# Altium PCB pcb - 副本.PcbDoc
Units mm, origin at the board's own origin, x right, y up, seen from the top; angles counter-clockwise.
Board outline 80.25 x 40.25 mm, 2 copper layers (Top Layer, Bottom Layer); 55 components, 41 nets, 228 pads, 54 vias.
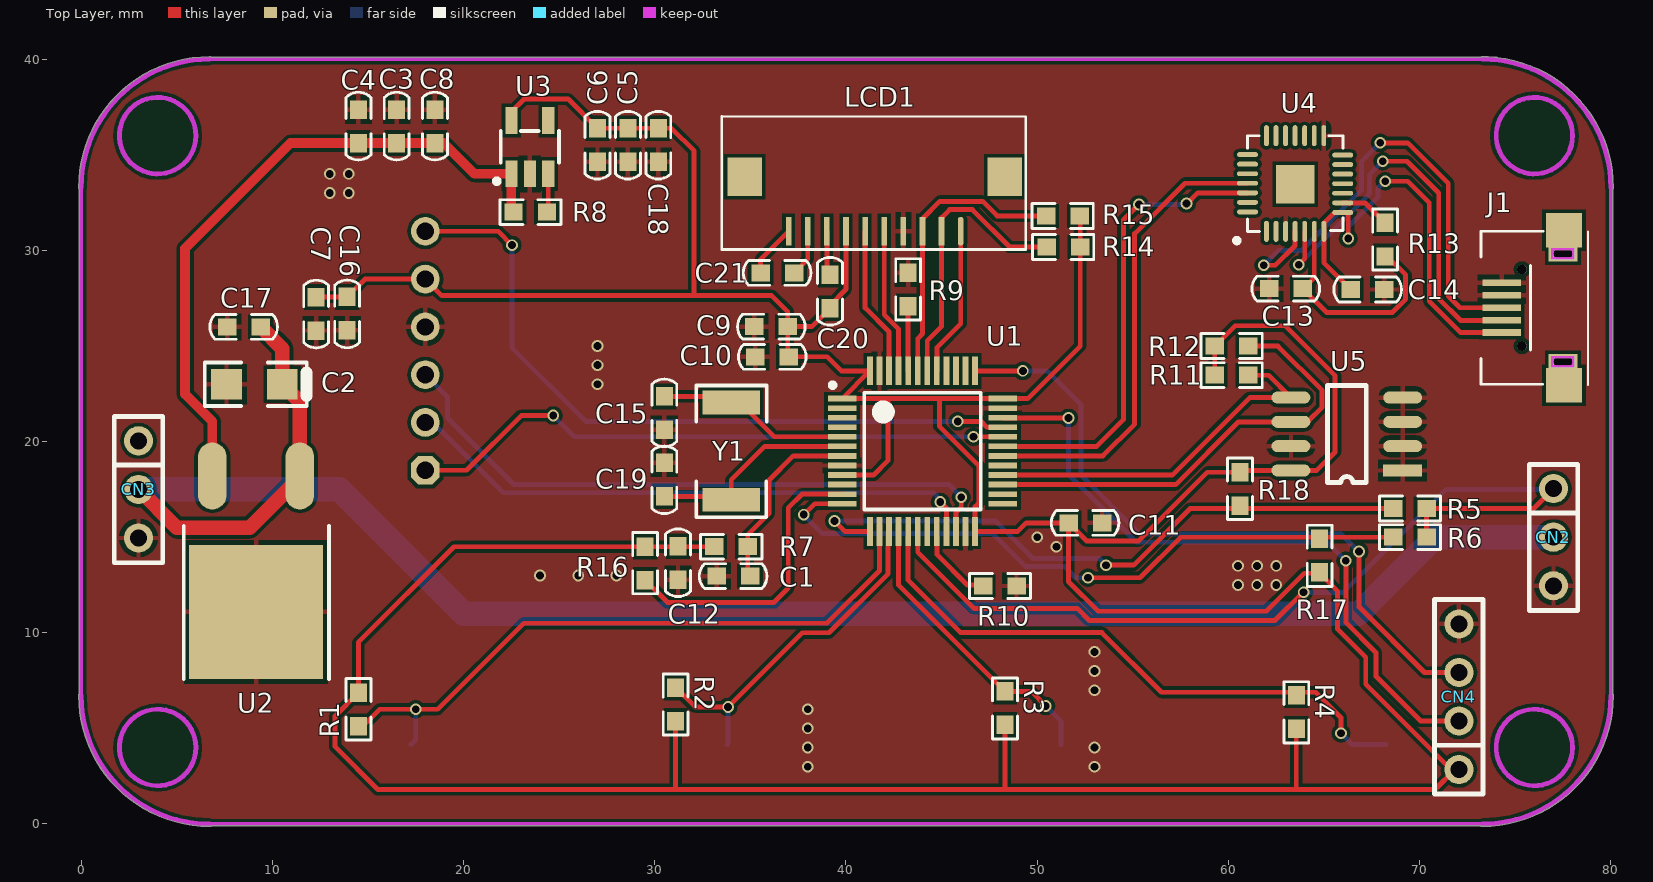
[diagram p0: Top Layer view]
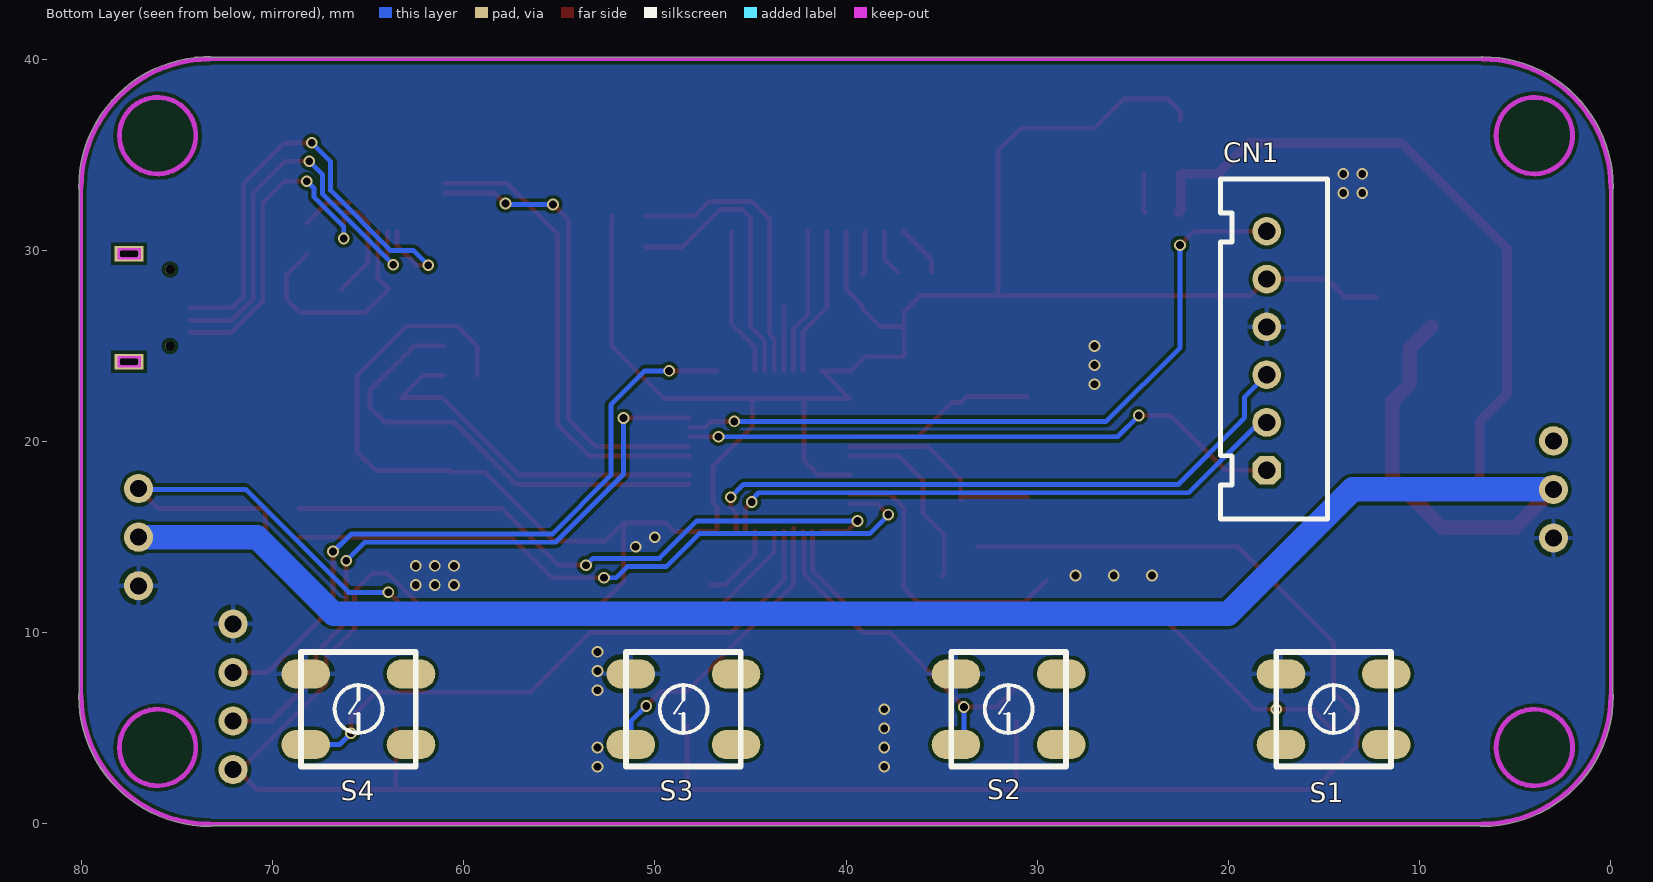
[diagram p1: Bottom Layer view, seen from below]
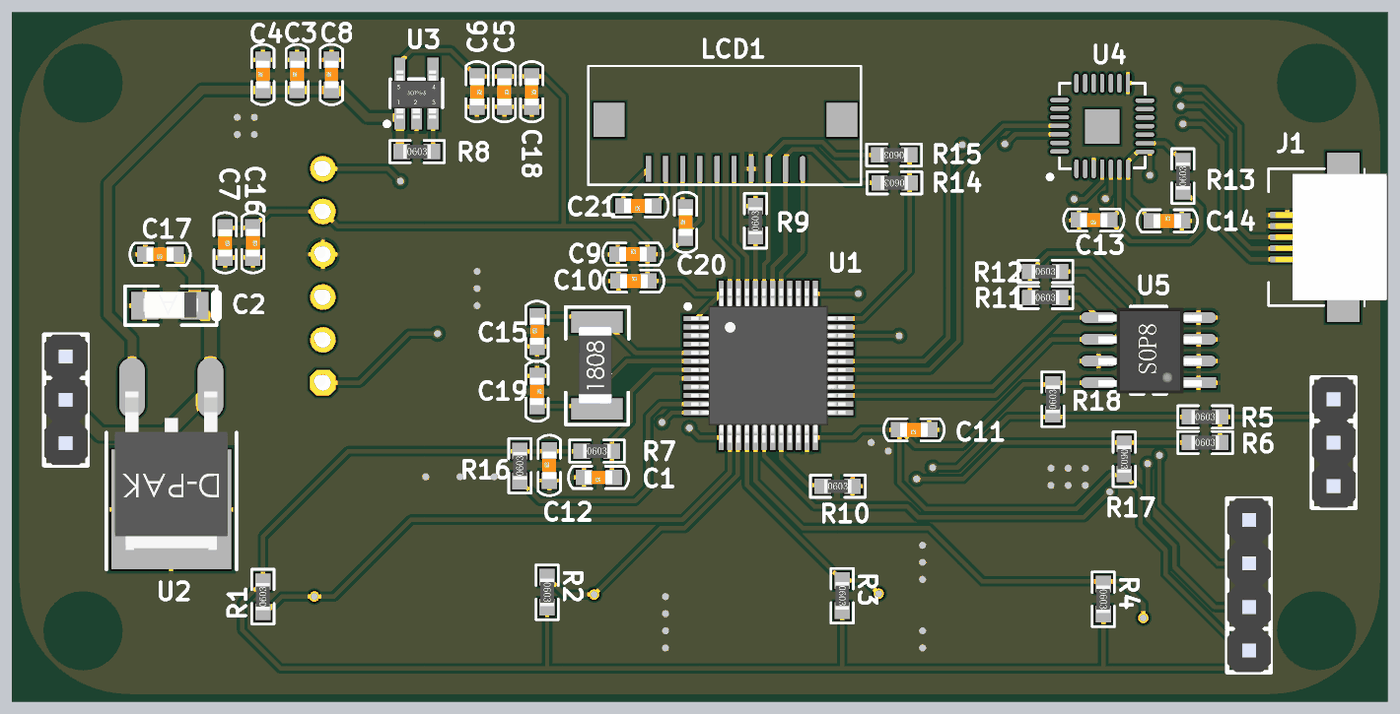
[diagram p2: 3D render of the assembled board from above, using the file's embedded part models]

## Layer stack, top to bottom
Top Solder: solder mask 0.0102, Solder Resist, Dk 3.5
Top Layer: signal copper 0.0356
Dielectric1: dielectric 0.32, FR-4, Dk 4.8
Bottom Layer: signal copper 0.0356
Bottom Solder: solder mask 0.0102, Solder Resist, Dk 3.5

## Board outline
-0.127,6.716 ccw(c6.716,6.716) 6.716,-0.127 ccw(c6.716,0) 6.795,-0.1 73.205,-0.1 ccw(c73.284,0) 73.284,-0.127 ccw(c73.284,6.716) 80.127,6.716 ccw(c80,6.716) 80.1,6.795 80.1,33.205 ccw(c80,33.284) 80.127,33.284 ccw(c73.284,33.284) 74.055,40.084 ccw(c74,40) 74,40.1 73.891,40.1 ccw(c73.284,33.284) 73.284,40.127 ccw(c73.284,40) 73.205,40.1 6.795,40.1 ccw(c6.716,40) 6.716,40.127 ccw(c6.716,33.284) -0.127,33.284 ccw(c0,33.284) -0.1,33.205 -0.1,6.795 ccw(c0,6.716)

## Design rules (kind name [scope] priority, off if disabled: settings)
Clearance [All] p1: gap=0.178
ComponentClearance [All] p1: gap=0 collisioncheckmode=3 verticalgap=0 showdistances=TRUE
PlaneConnect PlaneConnect_3 [InNet('VBAT')] p1: planeconnectstyle=Direct reliefexpansion=0.508 reliefentries=4 reliefconductorwidth=0.254 reliefairgap=0.254
PlaneConnect PlaneConnect_2 [InNet('GND')] p2: planeconnectstyle=Direct reliefexpansion=0.508 reliefentries=4 reliefconductorwidth=0.254 reliefairgap=0.254
PlaneConnect PlaneConnect_1 [InNet('VCC3V3')] p3: planeconnectstyle=Direct reliefexpansion=0.508 reliefentries=4 reliefconductorwidth=0.254 reliefairgap=0.254
PlaneConnect [All] p4: planeconnectstyle=Relief reliefexpansion=0.508 reliefentries=4 reliefconductorwidth=0.254 reliefairgap=0.254
PolygonConnect PolygonConnect_2 [IsVia] p1: connectstyle=Direct reliefconductorwidth=0.254 reliefentries=4 polygonreliefangle="90 Angle" airgapwidth=0.254
PolygonConnect PolygonConnect_1 [All vs InNet('VBAT')] p2: connectstyle=Direct reliefconductorwidth=0.254 reliefentries=4 polygonreliefangle="90 Angle" airgapwidth=0.254
PolygonConnect [All] p3: connectstyle=Relief reliefconductorwidth=0.254 reliefentries=4 polygonreliefangle="90 Angle" airgapwidth=0.254
RoutingVias [All] p1: holewidth=0.711 width=1.27 viastyle="Through Hole" minholewidth=0.406 minwidth=1.27 maxholewidth=0.711 maxwidth=1.27
SilkToSolderMaskClearance SilkscreenOverComponentPads [IsPad] p1: minsilkscreentomaskgap=0.254 clearancetoexposedcopper=TRUE
SolderMaskExpansion [All] p1: expansion=0.102
Width [All] p1: maxlimit=1.27 minlimit=0.254 preferedwidth=0.254
27 further rules are at their usual default settings.

## Components (designator, comment, footprint, x,y, rotation, side; value= is the part's Value field where it differs from the comment)
C1 "0.1uF" CAP-0603 34.097,12.964 r180 top
C2 "10uF" CAP-A 9,23 r180 top
C3 "0.1uF" CAP-0603 16.5,36.5 r90 top
C4 "0.1uF" CAP-0603 14.5,36.5 r90 top
C5 "0.1uF" CAP-0603 28.594,35.5 r270 top
C6 "0.1uF" CAP-0603 27,35.5 r270 top
C7 "0.33uF" CAP-0603 8.5,26 r180 top
C8 "0.1uF" CAP-0603 18.5,36.5 r90 top
C9 "0.1uF" CAP-0603 36.093,26.01 r0 top
C10 "0.1uF" CAP-0603 36.144,24.435 r0 top
C11 "0.1uF" CAP-0603 52.502,15.748 r180 top
C12 "0.1uF" CAP-0603 31.217,13.665 r90 top
C13 "0.1uF" CAP-0603 63,28 r180 top
C14 "0.1uF" CAP-0603 67.284,27.953 r0 top
C15 "22P" CAP-0603 30.5,21.5 r90 top
C16 "0.1uF" CAP-0603 13.912,26.678 r270 top
C17 "0.1uF" CAP-0603 12.294,26.67 r270 top
C18 "0.1uF" CAP-0603 30.187,35.5 r270 top
C19 "22P" CAP-0603 30.5,18 r270 top
C20 "0.1uF" CAP-0603 39.167,27.864 r90 top
C21 "1uF" CAP-0603 36.398,28.829 r180 top
CN1 "CN-6" CN-6 18,18.5 r90 bottom locked
CN2 "CN-3" IDC-3×1 77,15 r90 top
CN3 "CN-3" IDC-3×1 3,17.5 r90 top
CN4 "CN-4" IDC-4×1 72.053,2.845 r270 top
J1 "USB-micro" USB-MICRO 77,27 r90 top
LCD1 "LCD1602_I2C" LCD-IIC 41.5,36 r180 top
R1 "10K" RES-0603 14.5,6 r90 top
R2 "10K" RES-0603 31.09,6.248 r270 top
R3 "10K" RES-0603 48.311,6.045 r270 top
R4 "10K" RES-0603 63.551,5.842 r270 top
R5 "120R" RES-0603 69.5,16.5 r0 top
R6 "0R" RES-0603 69.5,15 r0 top
R7 "10K" RES-0603 34,14.5 r0 top
R8 "200K" RES-0603 23.5,32 r0 top
R9 "10K" RES-0603 43.25,27.959 r90 top
R10 "10K" RES-0603 48.057,12.446 r0 top
R11 "10K" RES-0603 60.173,24.994 r0 top
R12 "10K" RES-0603 60.173,23.47 r0 top
R13 "4.7K" RES-0603 68.199,30.569 r90 top
R14 "10K" RES-0603 51.359,30.175 r180 top
R15 "10K" RES-0603 51.333,31.801 r180 top
R16 "2K" RES-0603 29.5,13.644 r90 top
R17 "3K" RES-0603 64.772,14.027 r270 top
R18 "10K" RES-0603 60.607,17.532 r90 top
S1 "KEY" KEY-4X4X1.5 14.5,6 r180 bottom
S2 "KEY" KEY-4X4X1.5 31.5,6 r180 bottom
S3 "KEY" KEY-4X4X1.5 48.5,6 r180 bottom
S4 "KEY" KEY-4X4X1.5 65.5,6 r180 bottom
U1 "STM32F103C" LQFP-48 44,19.5 r0 top locked
U2 "L7805" TO-252 9.152,13.5 r270 top
U3 "spx6205" SOT-23(5) 22.5,34 r0 top
U4 "CP2102" QFN-28 61,36 r0 top
U5 "AT24C128" SOP-8(3.9) 69.113,18.491 r180 top
Y1 "8MHZ" XTAL-2512 34,19.5 r90 top

## Footprints (in the part's own frame and the unit in brackets; to place one, negate y for a bottom-side part, rotate by r counter-clockwise, add the part's x,y. Pads: shape width x height; smd on the part's side, far side on the other; paste and mask are expansions set on the pad)
CAP-0603 [mil]
  rect 38x35 smd: 1(-35,0) 2(34,0)
  silkscreen extent -70,-26 70,26, body extent -31,-16 32,16, height 12
CAP-A [mm]
  rect 1.6x1.6 smd: 1(-1.524,0) 2(1.397,0)
  silkscreen extent -2.79,-1.14 2.54,1.14, body extent -1.73,-0.84 1.47,0.76, height 1.6
CN-6 [mm]
  oct 1.5x1.5 hole 0.9: 1(0,0)
  round 1.5 hole 0.9: 2(2.5,0) 3(5,0) 4(7.5,0) 5(10,0) 6(12.5,0)
  silkscreen extent -2.54,-3.18 15.24,2.41, body extent -2.4,-1.77 15.1,2.03, height 6
IDC-3×1 [mil]
  round 60 hole 35: 1(100,0) 2(0,0) 3(-100,0)
  silkscreen extent -151,-50 150,50, body extent -150,-50 150,50, height 315
IDC-4×1 [mil]
  round 60 hole 35: 1(0,0) 2(-100,0) 3(-200,0) 4(-300,0)
  silkscreen extent -350,-50 50,50, body extent -350,-50 50,50, height 315
KEY-4X4X1.5 [mm]
  oval 2.54x1.524 smd: 1(-2.75,1.85) 2(-2.75,-1.85) 3(2.75,-1.85) 4(2.75,1.85)
  silkscreen extent -3,-3 3,3
LCD-IIC [mm]
  rect 1.8x2 smd: 0(-6.8,2.15) 0(6.8,2.15)
  oval 0.3x1.5 smd: 1(-4.5,5)
  rect 0.3x1.5 smd: 2(-3.5,5) 3(-2.5,5) 4(-1.5,5) 5(-0.5,5) 6(0.5,5) 7(1.5,5) 8(2.5,5) 9(3.5,5) 10(4.5,5)
  silkscreen extent -7.92,-1 8,5.94
LQFP-48 [mm]
  rect 1.5x0.3 smd: 1(-4.2,2.75) 2(-4.2,2.25) 3(-4.2,1.75) 4(-4.2,1.25) 5(-4.2,0.75) 6(-4.2,0.25) 7(-4.2,-0.25) 8(-4.2,-0.75) 9(-4.2,-1.25) 10(-4.2,-1.75) 11(-4.2,-2.25) 12(-4.2,-2.75) 25(4.2,-2.75) 26(4.2,-2.25) 27(4.2,-1.75) 28(4.2,-1.25) 29(4.2,-0.75) 30(4.2,-0.25) 31(4.2,0.25) 32(4.2,0.75) 33(4.2,1.25) 34(4.2,1.75) 35(4.2,2.25) 36(4.2,2.75)
  rect 0.3x1.5 smd: 13(-2.75,-4.2) 14(-2.25,-4.2) 15(-1.75,-4.2) 16(-1.25,-4.2) 17(-0.75,-4.2) 18(-0.25,-4.2) 19(0.25,-4.2) 20(0.75,-4.2) 21(1.25,-4.2) 22(1.75,-4.2) 23(2.25,-4.2) 24(2.75,-4.2) 37(2.75,4.2) 38(2.25,4.2) 39(1.75,4.2) 40(1.25,4.2) 41(0.75,4.2) 42(0.25,4.2) 43(-0.25,4.2) 44(-0.75,4.2) 45(-1.25,4.2) 46(-1.75,4.2) 47(-2.25,4.2) 48(-2.75,4.2)
  silkscreen extent -4.82,-3.05 3.05,3.57, body extent -4.5,-4.5 4.5,4.5, height 1.2
QFN-28 [mil]
  rect 78.74x78.74 smd: 0(98,-100)
  oval 10x43.31 smd: 1(39,-197) 2(58.69,-197) 3(78.37,-197) 4(98.06,-197) 5(117.74,-197) 6(137.43,-197) 7(157.11,-197) 15(157,0) 16(137.32,0) 17(117.63,0) 18(97.94,0) 19(78.26,0) 20(58.57,0) 21(38.89,0)
  oval 43.31x10 smd: 8(196,-158) 9(196,-138.31) 10(196,-118.63) 11(196,-98.94) 12(196,-79.26) 13(196,-59.57) 14(196,-39.89) 22(0,-39) 23(0,-58.68) 24(0,-78.37) 25(0,-98.06) 26(0,-117.74) 27(0,-137.43) 28(0,-157.11)
  silkscreen extent -27,-221 197,0, body extent 1,-195 197,1, height 59
RES-0603 [mil] "1/10W"
  rect 38x35 smd: 1(-35,0) 2(34,0)
  silkscreen extent -63,-26 63,26, body extent -31,-16 31,16, height 18
SOP-8(3.9) [mil]
  rect 80x25 smd: 1(0,0)
  oval 80x25 smd: 2(0,-50) 3(0,-100) 4(0,-150) 5(230,-150) 6(230,-100) 7(230,-50) 8(230,0)
  silkscreen extent 75,-175 155,25, body extent -8,-173 230,25, height 63
SOT-23(5) [mil]
  rect 25x55 smd: 1(0,0) 2(38,0) 3(76,0) 4(76,110) 5(0,110)
  silkscreen extent -35,-20 98,88, body extent -20,-2 94,108, height 43
TO-252 [mm] "D-PAK  / SOT-428"
  oval 3.5x1.5 smd: 1(-4.699,2.286) 3(-4.699,-2.294)
  rect 7x7 smd: 2(2.405,-0.004)
  silkscreen extent -2.08,-3.79 5.92,3.81, body extent -4.47,-3.3 4.78,3.3, height 2.31
USB-MICRO [mm]
  rect 0.35x2 smd: 1(-1.3,2.7) 2(-0.65,2.7) 3(0,2.7) 4(0.65,2.7) 5(1.3,2.7)
  rect 1.8x1.9 smd: 6(-4.05,-0.55) 6(4.05,-0.55)
  rect 0.8x1.5 hole 0.4 slot 1 at 90 deg: 6(-2.825,-0.5) 6(2.825,-0.5)
  round 0.5 hole 0.5 unplated: ""(-2,1.65) ""(2,1.65)
  Keep-Out Layer lines w0.127: -3.054,0.075 -3.054,-1.043 -2.596,-1.043 -2.596,0.075 -3.054,0.075 ; 2.596,0.075 2.596,-1.043 3.054,-1.043 3.054,0.075 2.596,0.075
  silkscreen extent -4.05,-1.8 4,3.8, body extent -3.69,-3.1 3.69,3.4, height 3.3
XTAL-2512 [mm]
  rect 1.25x3 smd: 1(-2.54,0) 2(2.54,0)
  silkscreen extent -3.45,-1.85 3.43,1.83, body extent -2.24,-0.86 2.28,1.08, height 1

## Part data
C1 C3 C4 C5 C6 C7 C8 C9 C10 C11 C12 C13 C14 C15 C16 C17 C18 C19 C20 C21: library part CAP, "Capacitor"
C2: library part CAP(POL), "Polar Capacitor"
LCD1: "LCD1602"
R1 R2 R3 R4 R5 R6 R7 R8 R9 R10 R11 R12 R13 R14 R15 R16 R17 R18: library part RES, "Resistor"
U1: library part STM32F103C(LQFP)
U2: library part 78XX
U3: library part SP6205(FIXED)
U4: library part MPU6050_1
Y1: library part XTAL(1), "Crystal"

## Via types
v1: diameter 0.61, hole 0.406, Top Layer to Bottom Layer, tented both sides, 50 vias
v2: diameter 0.61, hole 0.406, Top Layer to Bottom Layer, 4 vias

## Nets (pads, with @x,y where several pads share a name; then routed paths per layer and width w, separated by ;. In a path a pad name is that pad's centre, name@x,y a point inside that pad or via, vN(x,y) a via of type N, cw(c..) or ccw(c..) an arc to the next point about the centre after c; other vN are vias at no path point)
ADC8: CN2.1 R5.2 R6.2 U1.18 | length 47.2
  Top Layer w0.254: U1.18 43.75,14.213 46.685,11.278 52.095,11.278 52.73,10.643 62.433,10.643 63.906,12.116 v1(63.932,12.116) ; R6.2 R5.2 75.96,16.5 CN2.1
  Bottom Layer w0.254: v1(63.932,12.116) 66.015,12.116 71.399,17.5 CN2.1@77,17.5
BLE-KEY: CN1.6 U1.33 | length 37.6
  Top Layer w0.254: CN1.6 21.807,31 v1(22.53,30.277) ; v1(45.847,21.057) 47.062,21.057 47.369,20.75 U1.33
  Bottom Layer w0.254: v1(22.53,30.277) 22.53,24.917 26.391,21.057 v1(45.847,21.057)
BLE-RX: CN1.2 U1.21 | length 30.4
  Top Layer w0.254: v1(44.933,16.84) 45.263,16.51 45.263,15.313 U1.21
  Bottom Layer w0.254: CN1.2 18.395,21 22.073,17.323 44.577,17.323 44.933,16.967 v1(44.933,16.84)
BLE-S: CN1.1 U1.32 | length 31.8
  Top Layer w0.254: CN1.1 20.151,18.5 23.012,21.361 v1(24.689,21.361) ; v1(46.666,20.25) U1.32
  Bottom Layer w0.254: v1(24.689,21.361) 25.8,20.25 v1(46.666,20.25)
BLE-TX: CN1.3 U1.22 | length 33.2
  Top Layer w0.254: U1.22 45.75,16.286 46.025,16.561 v1(46.025,17.094)
  Bottom Layer w0.254: CN1.3 19.152,22.348 19.152,21.254 19.356,21.05 19.356,21.03 22.631,17.755 45.364,17.755 v1(46.025,17.094)
BOOT0: R9.1 U1.44 | length 3.4
  Top Layer w0.254: U1.44 R9.1
BOOT1: R10.1 U1.20 | length 4.2
  Top Layer w0.254: U1.20 44.75,14.102 46.352,12.5 R10.1@47.092,12.5
CP2102-RX: U1.30 U4.25 | length 24.5
  Top Layer w0.254: U1.30 53.438,19.25 55.093,20.904 55.093,30.875 57.727,33.509 U4.25
CP2102-TX: U1.31 U4.26 | length 24.4
  Top Layer w0.254: U1.31 53.117,19.75 54.508,21.141 54.508,31.587 v1(55.321,32.399) ; v1(57.81,32.449) 57.835,32.449 58.396,33.009 U4.26
  Bottom Layer w0.254: v1(55.321,32.399) 57.786,32.399 57.81,32.424 v1(57.81,32.449)
DIRC: LCD1.5 U1.45 | length 7.6
  Top Layer w0.254: LCD1.5 42,26.631 42.75,25.881 U1.45
EE-SCL: R11.2 U1.27 U5.6 | length 24.1
  Top Layer w0.254: U1.27 57.247,17.75 60.528,21.031 U5.6 64.135,21.031 64.897,21.793 64.897,22.682 62.586,24.994 R11.2
EE-SDA: R12.2 U1.28 U5.5 | length 19.5
  Top Layer w0.254: U1.28 57.061,18.25 61.112,22.301 U5.5 62.103,23.47 R12.2
GND: C1.2 C2.2 C3.2 C4.2 C5.2 C6.2 C7.2 C8.2 C9.1 C10.1 C11.1 C12.1 C13.2 C14.2 C15.1 C16.2 C17.2 C18.2 C19.1 CN1.4 CN2.3 CN3.3 CN4.4 J1.4 J1.5 LCD1.4 R9.2 R10.2 S1.1 S2.1 S3.1 S4.1 U1.8 U1.23 U1.35 U1.47 U2.2 U3.2 U4.3 U4.15 U5.1 U5.2 U5.3 U5.4 U5.7
  other v1: 38,3 53,3 38,4 53,4 38,5 38,6 53,7 53,8 53,9 60.5,12.5 61.5,12.5 62.5,12.5 24,13 26,13 28,13 60.5,13.5 61.5,13.5 62.5,13.5 51.003,14.503 50,15 27,23 27,24 27,25 13,33 14,33 13,34 14,34
KEY1: R1.1 S1.2 U1.14 | length 34.7
  Top Layer w0.254: R1.1 14.611,5 15.611,6 v2(17.5,6) 18.649,6 23.149,10.5 39,10.5 41.75,13.25 U1.14
  Bottom Layer w0.254: S1.2 17.5,4.4 v2(17.5,6)
KEY2: R2.1 S2.2 U1.15 | length 18.6
  Top Layer w0.254: R2.1 32.106,6.121 v2(33.833,6.121) 37.711,10 39.111,10 42.205,13.094 42.205,15.255 U1.15
  Bottom Layer w0.254: S2.2@33.783,4.15 33.833,4.199 v2(33.833,6.121)
KEY3: R3.1 S3.2 U1.16 | length 15.6
  Top Layer w0.254: U1.16@42.75,15.455 U1.16 42.75,12.495 R3.1 49.682,6.934 v2(50.444,6.172)
  Bottom Layer w0.254: v2(50.444,6.172) 51.25,5.367 S3.2
KEY4: R4.1 S4.2 U1.17 | length 31.6
  Top Layer w0.254: U1.17 43.25,12.75 45.992,10.008 53.381,10.008 56.5,6.889 64.561,6.889 65.888,5.563 v2(65.888,4.75)
  Bottom Layer w0.254: v2(65.888,4.75) 66.487,4.15 S4.2
LCD-RESET: LCD1.1 U1.41 | length 7.8
  Top Layer w0.254: U1.41 44.75,24.913 46,26.163 LCD1.1
LCD-SCL: LCD1.2 R14.2 U1.42 | length 14.8
  Top Layer w0.254: U1.42 44.25,25.276 45,26.026 LCD1.2 45,31.716 45.415,32.131 46.609,32.131 48.565,30.175 R14.2
LCD-SDA: LCD1.3 R15.2 U1.43 | length 15.2
  Top Layer w0.254: U1.43 43.75,25.387 44,25.637 LCD1.3 44,31.656 44.907,32.563 47.142,32.563 47.904,31.801 R15.2
NetC1_1: C1.1 R7.2 U1.7 | length 9.9
  Top Layer w0.254: C1.1 34.864,13.086 R7.2 34.864,15.128 35.966,16.231 35.966,17.966 37.25,19.25 U1.7
NetC13_1: C13.1 R13.1 U4.6 | length 12.2
  Top Layer w0.254: U4.6 64.491,28.563 63.927,28 C13.1 65.13,26.759 68.58,26.759 69.265,27.445 69.265,28.715 R13.1@68.199,29.782
NetC20_2: C20.2 LCD1.8 | length 2.3
  Top Layer w0.254: LCD1.8 39,28.894 C20.2
NetC21_1: C21.1 LCD1.9 | length 2.5
  Top Layer w0.254: C21.1 38,29.542 LCD1.9
NetC21_2: C21.2 LCD1.10 | length 2.8
  Top Layer w0.254: C21.2 35.535,29.535 LCD1.10
NetJ1_2: J1.2 U4.5 | length 22
  Top Layer w0.254: v1(63.677,29.249) 63.991,29.562 U4.5 ; v1(68.072,34.659) 69.341,34.659 71,33 71,27.476 72.136,26.34 J1.2@74.3,26.34
  Bottom Layer w0.254: v1(63.677,29.249) 63.982,29.553 ; 63.983,29.553 67.386,32.956 67.386,33.973 v1(68.072,34.659)
NetJ1_3: J1.3 U4.4 | length 25.8
  Top Layer w0.254: v1(61.849,29.223) 62.458,29.223 63.491,30.256 U4.4 ; v1(67.945,35.624) 69.376,35.624 71.5,33.5 71.5,27.611 72.111,27 J1.3
  Bottom Layer w0.254: v1(61.849,29.223) 62.611,29.985 63.804,29.985 66.954,33.135 66.954,34.633 v1(67.945,35.624)
NetR8_2: R8.2 U3.3 | length 2
  Top Layer w0.254: R8.2 24.43,32.067 U3.3
NetR13_2: R13.2 U4.9 | length 2.7
  Top Layer w0.254: U4.9 67.145,32.487 R13.2
NetR16_1: R16.1 U1.11 | length 15.6
  Top Layer w0.254: R16.1 30.673,11.582 36.22,11.582 36.982,12.344 36.982,16.535 37.697,17.25 U1.11
OSCIN: C15.2 U1.5 Y1.2 | length 10.2
  Top Layer w0.254: C15.2 33.676,22.364 Y1.2 34.46,22.04 36.25,20.25 U1.5
OSCOUT: C19.2 U1.6 Y1.1 | length 11.1
  Top Layer w0.254: C19.2 33.824,17.136 Y1.1 34,18 35.75,19.75 U1.6
SHL: LCD1.6 U1.46 | length 7.8
  Top Layer w0.254: LCD1.6 41,26.996 42.25,25.746 U1.46
SWCLK: CN4.3 U1.37 | length 35.6
  Top Layer w0.254: U1.37 v1@49.149,23.7 ; v1(66.827,14.249) 66.827,11.354 70.256,7.925 CN4.3
  Bottom Layer w0.254: v1(49.251,23.698) 50.521,23.698 52.299,21.92 52.299,18.238 55.373,15.164 65.888,15.164 66.827,14.224 v1(66.827,14.249)
SWDIO: CN4.2 U1.34 | length 34.8
  Top Layer w0.254: U1.34 48.216,21.234 v1(51.638,21.234) ; v1(66.142,13.767) 66.142,10.541 67.716,8.966 67.716,7.722 70.053,5.385 CN4.2
  Bottom Layer w0.254: v1(51.638,21.234) 51.638,18.288 55.194,14.732 65.176,14.732 v1(66.142,13.767)
U2-RX: R5.1 R18.1 U1.13 | length 33.5
  Top Layer w0.254: v1(39.395,15.85) 39.945,15.3 U1.13 ; v1(53.594,13.538) 55.038,13.538 58,16.5 R5.1
  Bottom Layer w0.254: v1(39.395,15.85) 47.803,15.85 49.759,13.894 53.238,13.894 v1(53.594,13.538)
U2-TX: R6.1 R17.1 U1.12 | length 35.3
  Top Layer w0.254: v1(37.795,16.18) 38.365,16.75 U1.12 ; v1(52.654,12.878) 55.378,12.878 57.5,15 R6.1
  Bottom Layer w0.254: v1(37.795,16.18) 37.795,16.154 38.76,15.189 47.676,15.189 49.403,13.462 50.565,13.462 50.569,13.459 51.431,13.459 52.012,12.878 v1(52.654,12.878)
VBUS: C14.1 J1.1 U4.7 U4.8 | length 23.1
  Top Layer w0.254: v1(66.268,30.62) 66.268,31.987 U4.8 65.552,31.987 64.991,31.425 U4.7 64.991,29.358 C14.1 ; v1(68.199,33.617) 69.383,33.617 70.5,32.5 70.5,27.341 72.141,25.7 J1.1
  Bottom Layer w0.254: v1(66.268,30.62) 66.268,31.228 67.818,32.777 67.818,33.236 v1(68.199,33.617)
VCC3V3: C5.1 C6.1 C9.2 C10.2 C11.2 C12.2 C16.1 C17.1 C18.1 C20.1 CN1.5 CN4.1 LCD1.7 R1.2 R2.2 R3.2 R4.2 R7.1 R11.1 R12.1 R14.1 R15.1 R16.2 R17.2 R18.2 U1.1 U1.9 U1.24 U1.36 U1.48 U3.5 U5.8 | length 257.8
  Top Layer w0.254: C17.1 13.905,27.559 C16.1 14.846,28.5 CN1.5 18.865,27.635 36.119,27.635 36.957,26.797 C9.2 ; U3.5 22.5,37.24 23.176,37.917 25.472,37.917 C6.1 30.87,36.389 32.055,35.204 32.055,27.635 ; R2.2 31.09,1.829 31.115,1.803 ; R7.1 19.5,14.5 14.5,9.5 R1.2 13.284,5.648 13.284,4.039 15.519,1.803 31.115,1.803 ; U1.9 41.44,18.25 42.189,18.999 42.189,22.174 42.113,22.25 ; LCD1.7 40,27.97 39.167,27.137 C20.1 38.202,26.01 C9.2 ; R3.2 48.311,1.829 48.336,1.803 ; R15.1 52.248,31.775 R14.1 52.248,24.994 49.504,22.25 U1.36 44.882,22.25 ; R12.1 R11.1 60.35,26.06 62.967,26.06 65.583,23.444 65.583,19.456 64.618,18.491 U5.8 60.702,18.491 R18.2 58.896,18.396 55.308,14.808 52.578,14.808 C11.2 ; R4.2 63.551,1.854 63.602,1.803 ; 31.115,1.803 48.336,1.803 ; C9.2 36.957,24.486 C10.2 39.014,24.435 39.749,23.7 U1.48 U1.1 42.113,22.25 ; 42.113,22.25 44.882,22.25 ; 44.882,22.25 44.882,20.803 46.965,18.72 46.965,16.815 46.75,16.6 U1.24 48.98,15.3 49.428,15.748 C11.2 ; 48.336,1.803 63.602,1.803 ; C11.2 51.638,12.675 53.188,11.125 61.987,11.125 63.11,12.247 63.11,12.259 63.963,13.113 64.772,13.113 65.71,12.175 65.71,10.185 67.183,8.712 67.183,7.317 71.655,2.845 CN4.1 71.845,2.845 70.803,1.803 63.602,1.803
VCC5.0: C3.1 C4.1 C8.1 R8.1 U2.3 U3.1 | length 34.6
  Top Layer w0.508: U2.3 6.858,21.056 5.436,22.479 5.436,30.099 10.948,35.611 C4.1 C3.1 C8.1 18.948,35.611 20.559,34 U3.1 22.5,32.111 R8.1
VCC5.0-8.4: C2.1 C7.1 CN2.2 CN3.2 U2.1 | length 97.2
  Top Layer w0.762: CN3.2 5.006,15.494 8.814,15.494 11.438,18.119 U2.1 11.438,22.086 C2.1 10.524,24.865 C7.1
  Bottom Layer w1.27: CN3.2 13.5,17.5 20.002,10.998 66.802,10.998 70.804,15 CN2.2@76.81,15
pads on no net: CN3.1 J1. J1.6 LCD1.0 S1.3 S1.4 S2.3 S2.4 S3.3 S3.4 S4.3 S4.4 U1.2 U1.3 U1.4 U1.10 U1.19 U1.25 U1.26 U1.29 U1.38 U1.39 U1.40 U3.4 U4.0 U4.1 U4.2 U4.10 U4.11 U4.12 U4.13 U4.14 U4.16 U4.17 U4.18 U4.19 U4.20 U4.21 U4.22 U4.23 U4.24 U4.27 U4.28

## Polygon pours and split planes (outlines as drawn)
GND on Top Layer "GND_L01_P000" (solid, remove dead copper, pour order 0): -0.268,0.211 79.732,0.211 79.732,40.211 -0.268,40.211
GND on Bottom Layer "GND_L02_P002" (solid, remove dead copper, pour order 2): 0.204,-0.068 80.204,-0.068 80.204,39.932 0.204,39.932

## Keep-outs
Keep-Out Layer:
  circle w0.254: c4,4 r2
  circle w0.254: c76,4 r2
  circle w0.254: c76,36 r2
  circle w0.254: c4,36 r2
  lines w0.2: 0,6.716 0,33.284 ; 6.716,0 73.284,0 ; 6.716,40 74,40 ; 80,6.716 80,33.284
  lines w0.254: 0,6.716 ccw(c6.716,6.716) 6.716,0 ; 0,33.284 cw(c6.716,33.284) 6.716,40 ; 73.284,0 ccw(c73.284,6.716) 80,6.716 ; 73.284,40 cw(c73.284,33.284) 80,33.284

## Text inside footprints (layer, text, board x,y; h text height)
U1: Mechanical 15 "1" at 43.836,19.05 h0.75